# EAGLE board Zio nRF52832 Dev Board V1.0 (EAGLE 9.1.1)
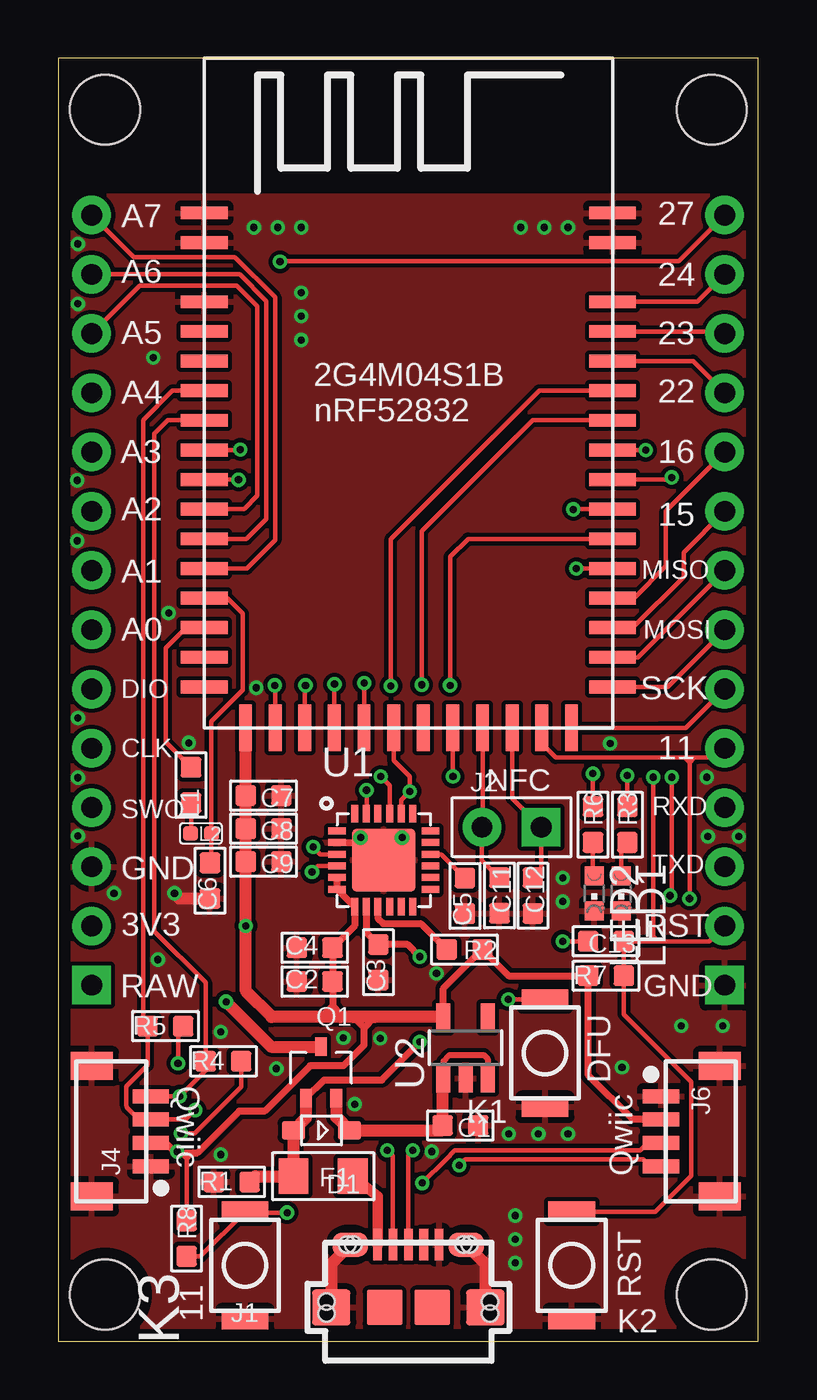
[diagram p0: board, top side]
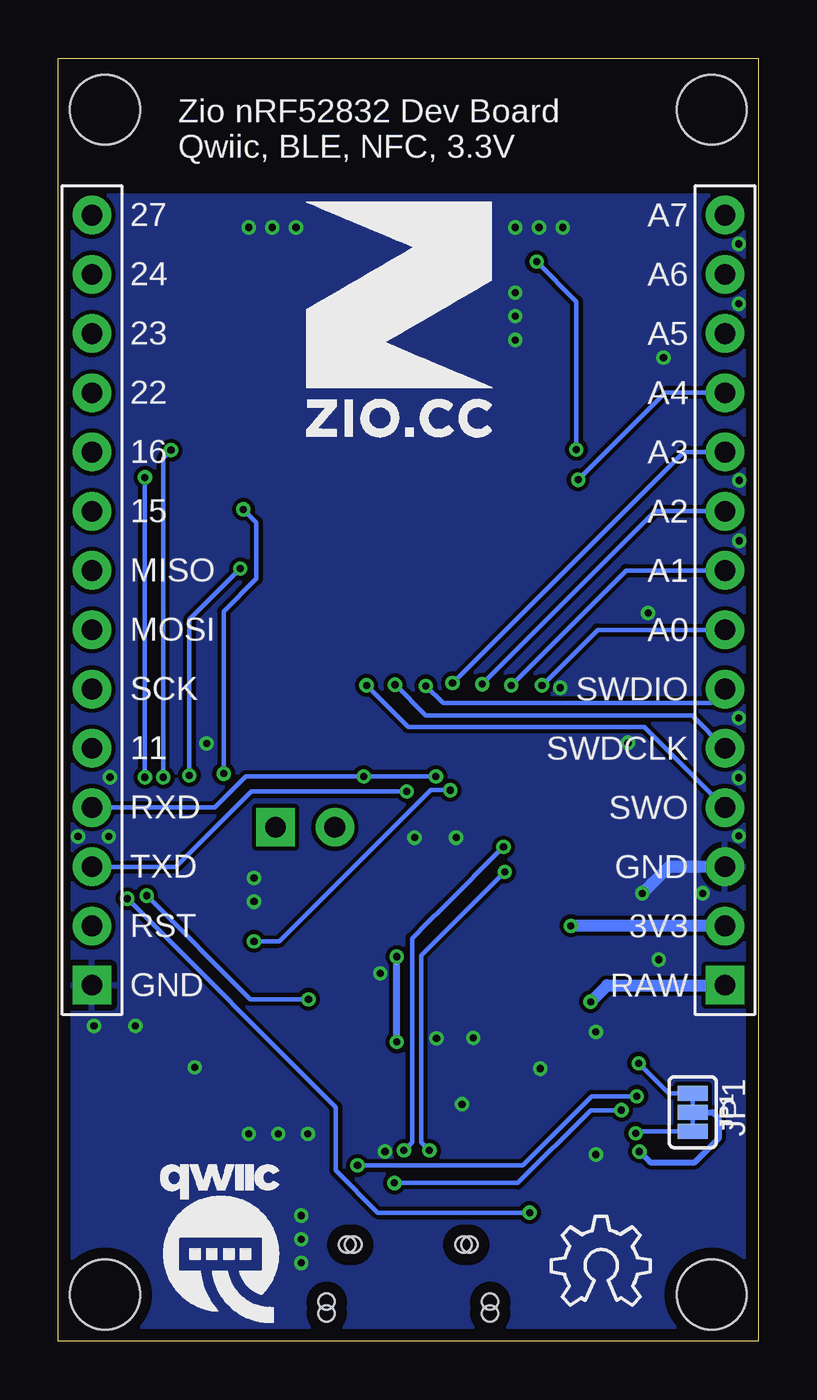
[diagram p1: board, bottom side, seen from below]

Size 30 x 55 mm. Coordinates in mm from the lower left corner, seen from the top.
Outline: 0,0 30,0 30,55 0,55 0,0
Copper layers (1*16): Top 0.035mm / dielectric 1.5mm / Bottom 0.035mm
Design rules "NOA Eagle Rule": minimum track width 7mil, minimum drill 12mil, track to track 7mil, track to pad 7mil, pad to pad 7mil, via to via 7mil, smd to smd 0mil, copper to edge 20mil, drill to drill 10mil, minimum pad ring 10mil, minimum via ring 6mil, stop-mask expansion 2mil, vias tented up to drill 25mil, thermal gap 10mil
Holes 3 mm at 2,2 2,52.8 28,2 28,52.8

## Footprints (pad centres in the part's own frame; a part is rotated, then mirrored left to right if it is on the bottom)
C0603 = smd 0.889 x 0.889: 1 -0.762,0; 2 0.762,0
SOD323 = smd 1 x 0.8: + 1.2,0; - -1.2,0
1206 = smd 1.27 x 1.524: 1 -1.27,0; 2 1.27,0
MICRO-SMD = smd 0.406 x 1.346: P1 -1.321,2.057; P2 -0.66,2.057; P3 0,2.057; P4 0.66,2.057; P5 1.321,2.057 | smd 1.651 x 1.549: S1 -3.302,-0.635; S2 3.302,-0.635 | smd 1.524 x 1.016: S3 -2.489,2.057; S4 2.489,2.057 | smd 1.524 x 1.524: S5 -1.016,-0.635; S6 1.016,-0.635 | hole 0.7: -3.505,-0.381; -3.505,-0.889; 3.505,-0.381; 3.505,-0.889; -2.616,2.057; -2.362,2.057; 2.362,2.057; 2.616,2.057
2P-2.54-65/35MIL = drill 0.889 pad 1.651 square: 1 0,1.27 | drill 0.889 pad 1.651: 2 0,-1.27
14P-SCREW-2.54 = drill 0.889 pad 1.651 square: 1 0,15.24 | drill 0.889 pad 1.651: 2 0,12.7; 3 0,10.16; 4 0,7.62; 5 0,5.08; 6 0,2.54; 7 0,0; 8 0,-2.54; 9 0,-5.08; 10 0,-7.62; 11 0,-10.16; 12 0,-12.7; 13 0,-15.24; 14 0,-17.78
JST-SH-4P-90 = smd 0.6 x 1.55: 1 -1.5,0; 2 -0.5,0; 3 0.5,0; 4 1.5,0 | smd 1.2 x 1.8: 5 -2.8,2.525; 6 2.8,2.525
SMT-JUMPER_3_2-NC_TRACE = smd 0.635 x 1.27: 1 -0.813,0; 2 0,0; 3 0.813,0
SKRKAEE020 = smd 0.87 x 2: 1 -2.3,0; 2 2.3,0
L0603 = smd 0.889 x 0.889: 1 -0.762,0; 2 0.762,0
L0402 = smd 0.635 x 0.635: 1 -0.445,0; 2 0.445,0
CHIPLED_0603 = smd 0.8 x 0.8: A 0,-0.75; C 0,0.75
SOT-323 = smd 0.5 x 0.8: 1 0.65,0; 2 -0.65,0; 3 0,-2.2
R0603 = smd 0.889 x 0.889: 1 -0.762,0; 2 0.762,0
QFN24_4X4 = smd 0.75 x 0.3: 1 -2,1.25; 2 -2,0.75; 3 -2,0.25; 4 -2,-0.25; 5 -2,-0.75; 6 -2,-1.25; 13 2,-1.25; 14 2,-0.75; 15 2,-0.25; 16 2,0.25; 17 2,0.75; 18 2,1.25 | smd 0.3 x 0.75: 7 -1.25,-2; 8 -0.75,-2; 9 -0.25,-2; 10 0.25,-2; 11 0.75,-2; 12 1.25,-2; 19 1.25,2; 20 0.75,2; 21 0.25,2; 22 -0.25,2; 23 -0.75,2; 24 -1.25,2 | smd 2.7 x 2.7: 25 0,0
SOT23-5 = smd 0.6 x 1.2: 1 -0.95,-1.306; 2 0,-1.306; 3 0.95,-1.306; 4 0.95,1.306; 5 -0.95,1.306
2G4M04S1B_NRF52832 = smd 2 x 0.55: 1 -8.75,7.72; 2 -8.75,6.45; 3 -8.75,3.91; 4 -8.75,2.64; 5 -8.75,1.37; 6 -8.75,0.1; 7 -8.75,-1.17; 8 -8.75,-2.44; 9 -8.75,-3.71; 10 -8.75,-4.98; 11 -8.75,-6.25; 12 -8.75,-7.52; 13 -8.75,-8.79; 14 -8.75,-10.06; 15 -8.75,-11.33; 16 -8.75,-12.6; 29 8.75,-12.6; 30 8.75,-11.33; 31 8.75,-10.06; 32 8.75,-8.79; 33 8.75,-7.52; 34 8.75,-6.25; 35 8.75,-4.98; 36 8.75,-3.71; 37 8.75,-2.44; 38 8.75,-1.17; 39 8.75,0.1; 40 8.75,1.37; 41 8.75,2.64; 42 8.75,3.91; 43 8.75,6.45; 44 8.75,7.72 | smd 0.55 x 2: 17 -6.98,-14.35; 18 -5.71,-14.35; 19 -4.44,-14.35; 20 -3.17,-14.35; 21 -1.9,-14.35; 22 -0.63,-14.35; 23 0.64,-14.35; 24 1.91,-14.35; 25 3.18,-14.35; 26 4.45,-14.35; 27 5.72,-14.35; 28 6.99,-14.35

## Placement (x,y rotation side)
C1  0.1uF ±10% 50V  [C0603]  17.23,9.25 180 top
C2  0.1uF ±10% 50V  [C0603]  10.99,15.42 0 top
C3  0.1uF ±10% 50V  [C0603]  13.72,16.25 90 top
C4  2.2uF ±10% 10V  [C0603]  10.99,16.86 0 top
C5  4.7uF ±10% 10V  [C0603]  17.43,19.09 90 top
C6  1uF ±10% 10V  [C0603]  6.5,19.74 90 top
C7  10uF ±10% 10V  [C0603]  8.79,23.39 180 top
C8  4.7uF ±10% 10V  [C0603]  8.79,21.97 180 top
C9  1uF ±10% 10V  [C0603]  8.79,20.56 180 top
C11  300pF ±10% 50V  [C0603]  18.91,19.1 270 top
C12  300pF ±10% 50V  [C0603]  20.34,19.1 270 top
C13  0.1uF ±10% 50V  [C0603]  23.47,17.14 180 top
D1  B5817WS-SJ  [SOD323]  11.28,9.04 180 top
F1  500mA  [1206]  11.35,7.07 180 top
J1  [MICRO-SMD]  15,2.08 0 top
J2  [2P-2.54-65/35MIL]  19.42,22.03 270 top
J3  [14P-SCREW-2.54]  1.43,30.5 180 bottom
J4  JST-SH-4P  [JST-SH-4P-90]  3.97,9 90 top
J5  [14P-SCREW-2.54]  28.56,30.5 180 bottom
J6  JST-SH-4P  [JST-SH-4P-90]  25.83,9 270 top
JP1  SMT-JUMPER_3_2-NC_TRACE  [SMT-JUMPER_3_2-NC_TRACE]  2.81,9.82 270 bottom
K1  [SKRKAEE020]  20.86,12.35 270 top
K2  [SKRKAEE020]  22,3.25 270 top
K3  [SKRKAEE020]  8,3.25 90 top
L1  10uH ±20%  [L0603]  5.69,23.84 90 top
L2  15nH ±10%  [L0402]  6.11,21.77 180 top
LED1  RED  [CHIPLED_0603]  24.12,19.2 180 top
LED2  BLUE  [CHIPLED_0603]  22.96,19.2 180 top
Q1  AO7401  [SOT-323]  11.26,10.42 180 top
R1  10k ±1%  [R0603]  7.43,6.83 0 top
R2  10k ±1%  [R0603]  17.41,16.79 180 top
R3  1k ±1%  [R0603]  24.39,22.14 270 top
R4  4.7K ±1%  [R0603]  7.08,12 0 top
R5  4.7K ±1%  [R0603]  4.59,13.51 0 top
R6  1k ±1%  [R0603]  22.91,22.14 270 top
R7  10k ±1%  [R0603]  23.47,15.67 0 top
R8  1k ±1%  [R0603]  5.5,4.4 270 top
U1  CP2104  [QFN24_4X4]  13.95,20.62 0 top
U2  XC6210B332MR  [SOT23-5]  17.45,12.58 0 top
U3  2G4M04S1B  [2G4M04S1B_NRF52832]  15,40.65 0 top
U$8  [10MM]  19.38,38.79 0 bottom
U$11  [QWIIC-LOGO-MEDIUM]  23.09,4.24 0 bottom
U$12  [OSHW_6X150_NOTEXT]  8.86,1.55 0 bottom

## Library data of the parts
C1-C9 C11-C13 L1 L2 R1-R8 = RCL
D1 LED1 LED2 Q1 = Discrete_NOA
F1 K1-K3 = Discrete
J1 J2 = Connector_NOA
J3-J6 = Connector
JP1 = NOA-Jumpers
U1 U2 = IC_NOA
U3 = Other_Module
U$8 = ZIO_silkscreen_package
U$11 = Z_silkscreen_package
U$12 = Logo_OSHW

## Nets
+3V3: C2.2 C4.2 C7.2 C8.2 C9.2 J3.2 J4.2 J6.2 JP1.2 R2.1 R7.1 R8.1 U1.5 U1.6 U1.7 U2.5 U3.17
A0/P0.02: J3.7 U3.18
A1/P0.03: J3.8 U3.19
A2/P0.04: J3.9 U3.20
A3/P0.05: J3.10 U3.21
A4/P0.28: J3.11 U3.9
A5/P0.29: J3.12 U3.10
A6/P0.30: J3.13 U3.11
A7/P0.31: J3.14 U3.12
DEC4: C6.2 L2.1 U3.13
DFU/P0.20: K1.1 U3.36
DTR: C13.2 U1.23
GND: C1.1 C2.1 C3.1 C4.1 C5.1 C6.1 C7.1 C8.1 C9.1 C11.2 C12.2 J1.P5 J1.S1 J1.S2 J1.S3 J1.S4 J3.3 J4.1 J4.5 J4.6 J5.1 J6.1 J6.5 J6.6 K1.2 K2.2 K3.1 LED1.C LED2.C R1.1 U1.2 U1.25 U2.2 U3.1 U3.2 U3.3 U3.43 U3.44
N$1: L1.1 L2.2
N$2: J1.P3 U1.3
N$3: R2.2 U1.9
N$4: J1.P2 U1.4
N$5: F1.1 J1.P1
N$6: LED2.A R6.2
N$7: C5.2 U1.16
N$8: LED1.A R3.2
N$14: L1.2 U3.14
N$34: JP1.3 R4.2
N$36: JP1.1 R5.2
NFC1: C11.1 J2.2 U3.25
NFC2: C12.1 J2.1 U3.26
P0.07: U3.23
P0.11: J5.5 K3.2 R8.2 U3.27
P0.12/SCK: J5.6 U3.28
P0.13/MOSI: J5.7 U3.29
P0.14/MISO: J5.8 U3.30
P0.15: J5.9 U3.31
P0.16: J5.10 U3.32
P0.17/LED1: R3.1 U3.33
P0.18/SWO: J3.4 U3.34
P0.19/LED2: R6.1 U3.35
P0.22: J5.11 U3.40
P0.23: J5.12 U3.41
P0.24: J5.13 U3.42
P0.27: J5.14 U3.8
RAW: J3.1 Q1.3
RESET: C13.1 J5.2 K2.1 R7.2 U3.37
RXD: J5.3 U1.20 U3.22
SCL: J4.4 J6.4 R4.1 U3.7
SDA: J4.3 J6.3 R5.1 U3.6
SWDCLK: J3.5 U3.38
SWDIO: J3.6 U3.39
TXD: J5.4 U1.21 U3.24
VBUS: C3.2 D1.+ F1.2 Q1.1 R1.2 U1.8
VIN: C1.2 D1.- Q1.2 U2.1 U2.3

## Tracks (layer width: path | path; a pad name or v marks a point on that pad's centre or on a via)
+3V3  (via drill 0.3)
  Top 0.203: R8.1 5.5,7.81 | 5.5,7.81 5.77,8.08 | 5.5,7.81 5.26,8.05 5.26,8.08
  Top 0.254: v5.1,8.13 4.98,8.13 4.71,8.39
  Top 0.305: U1.5 U1.6 U1.7 12.7,17.81 C4.2 C2.2 11.75,14.37 | 11.75,14.37 11.28,13.89 | 11.75,14.37 12.09,14.03 12.09,13.89 | J6.2 24.61,9.5 22.71,11.4 R7.1 19.29,15.67 R2.1 16.5,15.12 U2.5 | J4.2 4.61,8.5 4.71,8.39 5.03,8.08 5.26,8.08 5.77,8.08 5.97,8.08 7.75,9.86 8.84,9.86 10.79,11.81 12.22,11.81 13.11,12.7 13.11,13.44 | 13.11,13.44 13.56,13.89 | 13.11,13.44 12.65,13.89 12.62,13.89
  Top 0.508: U2.5 13.56,13.89 12.62,13.89 12.09,13.89 11.28,13.89 9.14,13.89 8.03,15.01 v8.03,17.8 C9.2 C8.2 C7.2 U3.17
  Bottom 0.254: JP1.2 1.97,9.81 1.7,9.55 1.7,8.69 2.72,7.67 4.64,7.67 v5.1,8.13
  Bottom 0.508: J3.2 v8.03,17.8
A0/P0.02  (via drill 0.3)
  Top 0.203: U3.18 9.29,28.1 v9.27,28.12
  Bottom 0.203: v9.27,28.12 6.89,30.5 J3.7
A1/P0.03  (via drill 0.3)
  Top 0.203: U3.19 10.56,28.09 v10.59,28.12
  Bottom 0.203: v10.59,28.12 5.67,33.04 J3.8
A2/P0.04  (via drill 0.3)
  Top 0.203: U3.20 v11.83,28.16 v11.84,28.17
  Bottom 0.203: v11.84,28.17 4.42,35.58 J3.9
A3/P0.05  (via drill 0.3)
  Top 0.203: U3.21 v13.1,28.21 v13.11,28.22
  Bottom 0.203: v13.11,28.22 3.21,38.12 J3.10
A4/P0.28  (via drill 0.3)
  Top 0.203: v7.72,36.93 U3.9
  Bottom 0.203: J3.11 3.99,40.66 v7.72,36.93
A5/P0.29
  Top 0.203: U3.10 7.96,35.67 8.53,36.25 8.53,44.37 7.64,45.26 3.49,45.26 J3.12
A6/P0.30
  Top 0.203: U3.11 8.06,34.4 8.91,35.26 8.91,44.6 7.77,45.74 J3.13
A7/P0.31
  Top 0.203: U3.12 8.09,33.13 9.3,34.34 9.3,44.76 7.57,46.48 3.23,46.48 J3.14
DEC4
  Top 0.203: U3.13 7.23,31.86 7.9,31.19 7.9,27.91 6.56,26.57 L2.1 6.56,20.45 C6.2
DFU/P0.20  (via drill 0.3)
  Top 0.203: K1.1 v19.28,14.65 v19.28,14.66 | v26.21,19.1 26.29,19.18 v26.29,24.18 | v26.29,37.03 26.2,36.94 U3.36
  Bottom 0.203: v19.28,14.66 21.77,14.66 v26.21,19.1 | v26.29,24.18 v26.29,37.03
DTR  (via drill 0.3)
  Top 0.203: v13.21,23.62 13.21,22.64 U1.23 | C13.2 v21.61,17.14
  Bottom 0.203: v13.21,23.62 14.05,23.62 20.52,17.14 v21.61,17.14
GND  (via drill 0.3)
  Top 0.305: U1.2 12.95,21.37 | 12.95,21.37 v12.95,21.59 | U1.25 12.95,20.62 12.95,21.37
  Top 0.508: J1.S3 11.7,3.33 J1.S1 | J1.S4 18.3,3.33 J1.S2 | v4.98,19.2 5.2,18.98 C6.1
  Bottom 0.508: J3.3 3.83,20.34 4.57,19.61 v4.97,19.2 v4.98,19.2
  other vias: 14.73,21.59 9.35,11.68 12.7,10.16 16,8.13 19.3,8.89 5.59,25.65 4.72,31.22 23.65,25.63 12.22,13 13.79,12.98 8.48,28.02 0.84,26.72 0.84,24.16 0.81,34.32 0.81,36.91 0.84,44.48 0.84,47.04 29.16,21.64 16.21,15.77 0.84,21.67 2.39,19.2 4.27,16.36 6.96,13.26 19.58,3.35 19.58,4.37 19.58,5.38 24.16,11.73 26.7,13.51 28.47,13.51 21.62,19.86 21.62,18.85 20.57,8.89 21.84,8.89 8.38,47.75 9.4,47.75 10.41,47.75 21.84,47.75 20.83,47.75 19.81,47.75 10.41,44.96 10.41,43.94 10.41,42.93 4.06,42.16 27.84,21.64 27.79,24.18 6.96,8
  pour Top: 0,49.1 30,49.1 30,0 0,0
  pour Bottom: 0,49.1 30,49.1 30,0 0,0
N$1
  Top 0.203: L1.1 5.69,21.79 L2.2
N$2  (via drill 0.3)
  Top 0.203: v10.92,21.18 11.23,20.87 U1.3 | J1.P3 15,7.99 v15.19,8.18
  Bottom 0.203: 14.16,17.95 13.53,18.58 | 13.53,18.58 v10.92,21.18 | 14.16,17.95 13.53,18.58 | v15.19,8.18 14.83,8.53 14.83,17.27 14.16,17.95
N$3
  Top 0.305: U1.9 13.7,18.13 13.92,17.91 15.53,17.91 R2.2
N$4  (via drill 0.3)
  Top 0.203: U1.4 11.13,20.37 v10.87,20.12 | J1.P2 14.34,7.94 v14.1,8.18
  Bottom 0.203: v14.1,8.18 14.45,8.53 14.45,16.54 v10.87,20.12
N$5
  Top 0.457: J1.P1 13.68,6.22 F1.1
N$6
  Top 0.203: R6.2 22.91,20 LED2.A
N$7
  Top 0.203: U1.16 16.41,20.87 C5.2
N$8
  Top 0.203: R3.2 24.12,21.12 LED1.A
N$14
  Top 0.203: L1.2 4.6,25.69 4.6,29.72 5.49,30.61 5.5,30.59 U3.14
N$34  (via drill 0.3)
  Top 0.203: v5.26,8.91 5.84,8.91 7.84,10.91 R4.2
  Bottom 0.203: JP1.3 5.17,9 v5.26,8.91
N$36  (via drill 0.3)
  Top 0.203: v5.13,11.91 5.13,13.28 R5.2
  Bottom 0.203: JP1.1 3.85,10.63 v5.13,11.91
NFC1
  Top 0.203: U3.25 18.18,22.06 J2.2 18.15,20.62 C11.1
NFC2
  Top 0.203: U3.26 19.45,23.27 J2.1 20.69,20.21 C12.1
P0.11  (via drill 0.3)
  Top 0.203: U3.27 20.72,25.8 20.62,25.7 21.31,25.02 26.77,25.02 | J5.5 28.16,25.02 27.38,25.02 | 27.38,25.02 27.05,25.02 | 27.05,25.02 26.77,25.02 | R8.2 6.09,3.64 K3.2 8.04,5.51 v9.8,5.51 | 27.05,25.02 27.05,24.82 | 27.05,24.82 v27.05,18.97 | 27.05,24.82 26.85,25.02 26.77,25.02 | 27.05,24.82 27.26,25.02 27.38,25.02
  Bottom 0.203: v27.05,18.97 18.11,10.03 18.11,7.32 16.31,5.51 v9.8,5.51
P0.12/SCK
  Top 0.203: U3.28 25.78,26.3 26.9,26.3 J5.6
P0.13/MOSI
  Top 0.203: U3.29 26.11,28.05 J5.7
P0.14/MISO
  Top 0.203: U3.30 24.84,29.32 J5.8
P0.15
  Top 0.203: U3.31 24.62,30.59 26.8,32.77 26.8,33.82 J5.9
P0.16
  Top 0.203: U3.32 24.67,31.86 26.04,33.22 26.04,35.59 J5.10
P0.17/LED1  (via drill 0.3)
  Top 0.203: U3.33 v22.21,33.13 v22.2,33.12 | v24.38,24.26 R3.1
  Bottom 0.203: v22.2,33.12 24.38,30.94 v24.38,24.26
P0.18/SWO  (via drill 0.3)
  Top 0.203: v16.79,28.12 16.79,33.63 17.56,34.4 U3.34
  Bottom 0.203: J3.4 4.89,26.34 15.01,26.34 v16.79,28.12
P0.19/LED2  (via drill 0.3)
  Top 0.203: U3.35 v22.08,35.67 v22.07,35.66 | v22.91,24.33 R6.1
  Bottom 0.203: v22.07,35.66 21.51,35.1 21.51,32.69 22.91,31.29 v22.91,24.33
P0.22
  Top 0.203: U3.40 27.2,42.02 J5.11
P0.23
  Top 0.203: U3.41 28.47,43.29 J5.12
P0.24
  Top 0.203: U3.42 27.38,44.56 J5.13
P0.27  (via drill 0.3)
  Top 0.203: v9.5,46.28 9.53,46.3 25.4,46.3 26.58,46.3 J5.14 | v7.8,38.23 7.78,38.21 U3.8
  Bottom 0.203: v9.5,46.28 7.8,44.58 v7.8,38.23
RAW  (via drill 0.3)
  Top 0.508: Q1.3 9.12,12.62 v7.19,14.55
  Bottom 0.508: v7.19,14.55 6.48,15.26 J3.1
RESET  (via drill 0.3)
  Top 0.203: K2.1 25.59,5.55 27.13,7.09 27.13,11.12 24.23,14.02 R7.2 24.23,16.13 C13.1 25.3,17.14 | v25.17,38.2 v25.16,38.21 U3.37 | J5.2 27.91,17.14 25.7,17.14 | 25.7,17.14 25.3,17.14 | 25.5,17.35 25.3,17.14 | v25.5,24.18 25.5,17.35 | 25.5,17.35 25.7,17.14
  Bottom 0.203: v25.5,24.18 25.5,37.87 v25.17,38.2
RXD  (via drill 0.3)
  Top 0.203: U1.20 14.7,23.2 v15.06,23.57 15.06,24.21 14.37,24.9 U3.22
  Bottom 0.203: v15.06,23.57 21.74,23.57 24.97,20.34 J5.3
SCL  (via drill 0.3)
  Top 0.203: U3.7 4.68,39.48 4.12,38.91 4.12,17.58 6.31,15.38 R4.1 6.31,11.61 v5.21,10.5 J4.4 | J6.4 25.37,7.5 25.07,7.8 17.44,7.8 v17.18,7.54
  Bottom 0.203: v17.18,7.54 10.1,7.54 7.13,10.5 v5.21,10.5
SDA  (via drill 0.3)
  Top 0.203: 3.45,9.5 3.25,9.7 | 3.25,9.7 2.93,10.02 2.93,10.06 2.91,10.09 2.91,10.92 3.83,11.84 R5.1 3.63,13.7 3.63,20.6 3.63,39.5 4.88,40.75 U3.6 | J6.3 25.27,8.5 24.94,8.18 17.17,8.18 | 17.17,8.18 16.99,8.18 | v15.6,6.78 16.6,7.79 16.99,8.18 | 16.99,8.18 17.17,8.18 | v5.87,9.91 5.46,9.5 J4.3 3.45,9.5 | 3.45,9.5 3.25,9.7
  Bottom 0.203: v15.6,6.78 10.31,6.78 7.19,9.91 v5.87,9.91
SWDCLK  (via drill 0.3)
  Top 0.203: v15.57,28.14 15.57,34.72 20.33,39.48 U3.38
  Bottom 0.203: J3.5 2.83,26.82 14.25,26.82 v15.57,28.14
SWDIO  (via drill 0.3)
  Top 0.203: v14.25,28.09 14.25,34.39 20.61,40.75 U3.39
  Bottom 0.203: J3.6 2.03,27.36 13.51,27.36 v14.25,28.09
TXD  (via drill 0.3)
  Top 0.203: U1.21 14.2,23.83 v13.82,24.21 | U3.24 v16.91,24.21 v16.92,24.21
  Bottom 0.203: v13.82,24.21 v16.92,24.21 21.97,24.21 23.3,22.88 J5.4
VBUS  (via drill 0.3)
  Top 0.305: U1.8 13.2,17.53 C3.2 14.97,17.01 v15.49,16.48 | Q1.1 11.39,11.2 13.87,11.2 v15.49,12.83
  Top 0.508: D1.+ F1.2 8.44,7.08 R1.2 | D1.+ | Q1.1 10.61,9.57 D1.+
  Bottom 0.305: v15.49,12.83 v15.49,16.48
VIN
  Top 0.254: U2.3 18.4,12.11 18.24,12.27 16.76,12.27 16.5,12.01 U2.1
  Top 0.508: Q1.2 11.91,9.61 D1.- 16.47,9.04 C1.2 16.47,11.24 U2.1

## Text on the board
tPlace: 27 | A7 | 24 | A6 | 23 | A5 | 22 | A4 | 16 | A3 | 15 | A2 | A1 | MISO | A0 | MOSI | DIO | SCK | 11 | CLK | NFC | RXD | SWO | GND | TXD | 3V3 | RST | RAW | GND | Qwiic | DFU | Qwiic | RST | 11
bPlace: Zio nRF52832 Dev Board / Qwiic, BLE, NFC, 3.3V | A7 | 27 | A6 | 24 | A5 | 23 | A4 | 22 | A3 | 16 | A2 | 15 | A1 | MISO | A0 | MOSI | SWDIO | SCK | SWDCLK | 11 | SWO | RXD | GND | TXD | 3V3 | RST | RAW | GND | JP1